# Altium PCB etapa_1.PcbDoc (part 1 of 2)
Units mm, origin at the board's own origin, x right, y up, seen from the top; angles counter-clockwise.
Board outline 39 x 30.7 mm, 4 copper layers (Top Layer, X, Y, Bottom Layer); 218 components, 89 nets, 624 pads, 178 vias.
Unrouted connection lines stored in the file: 2.
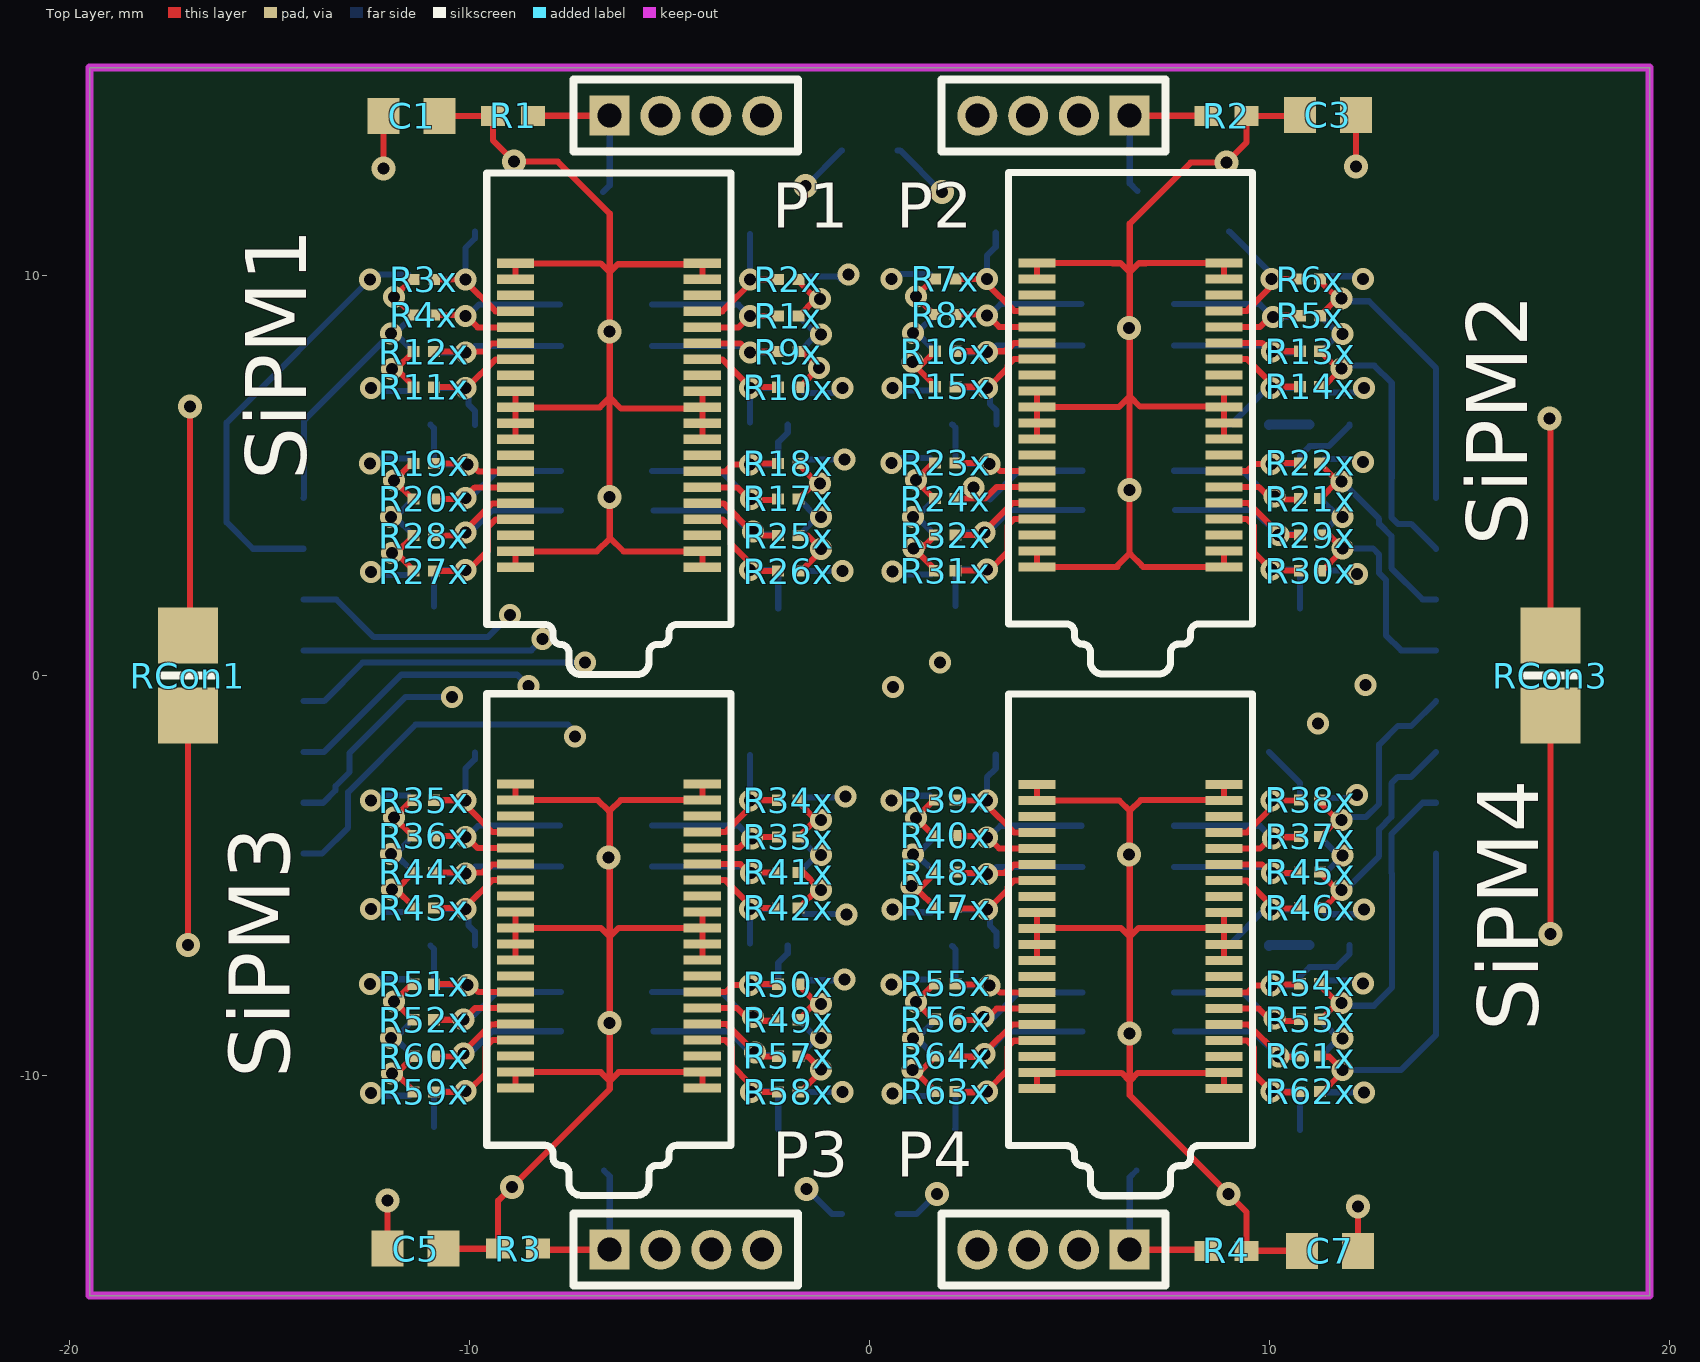
[diagram p0: Top Layer view]
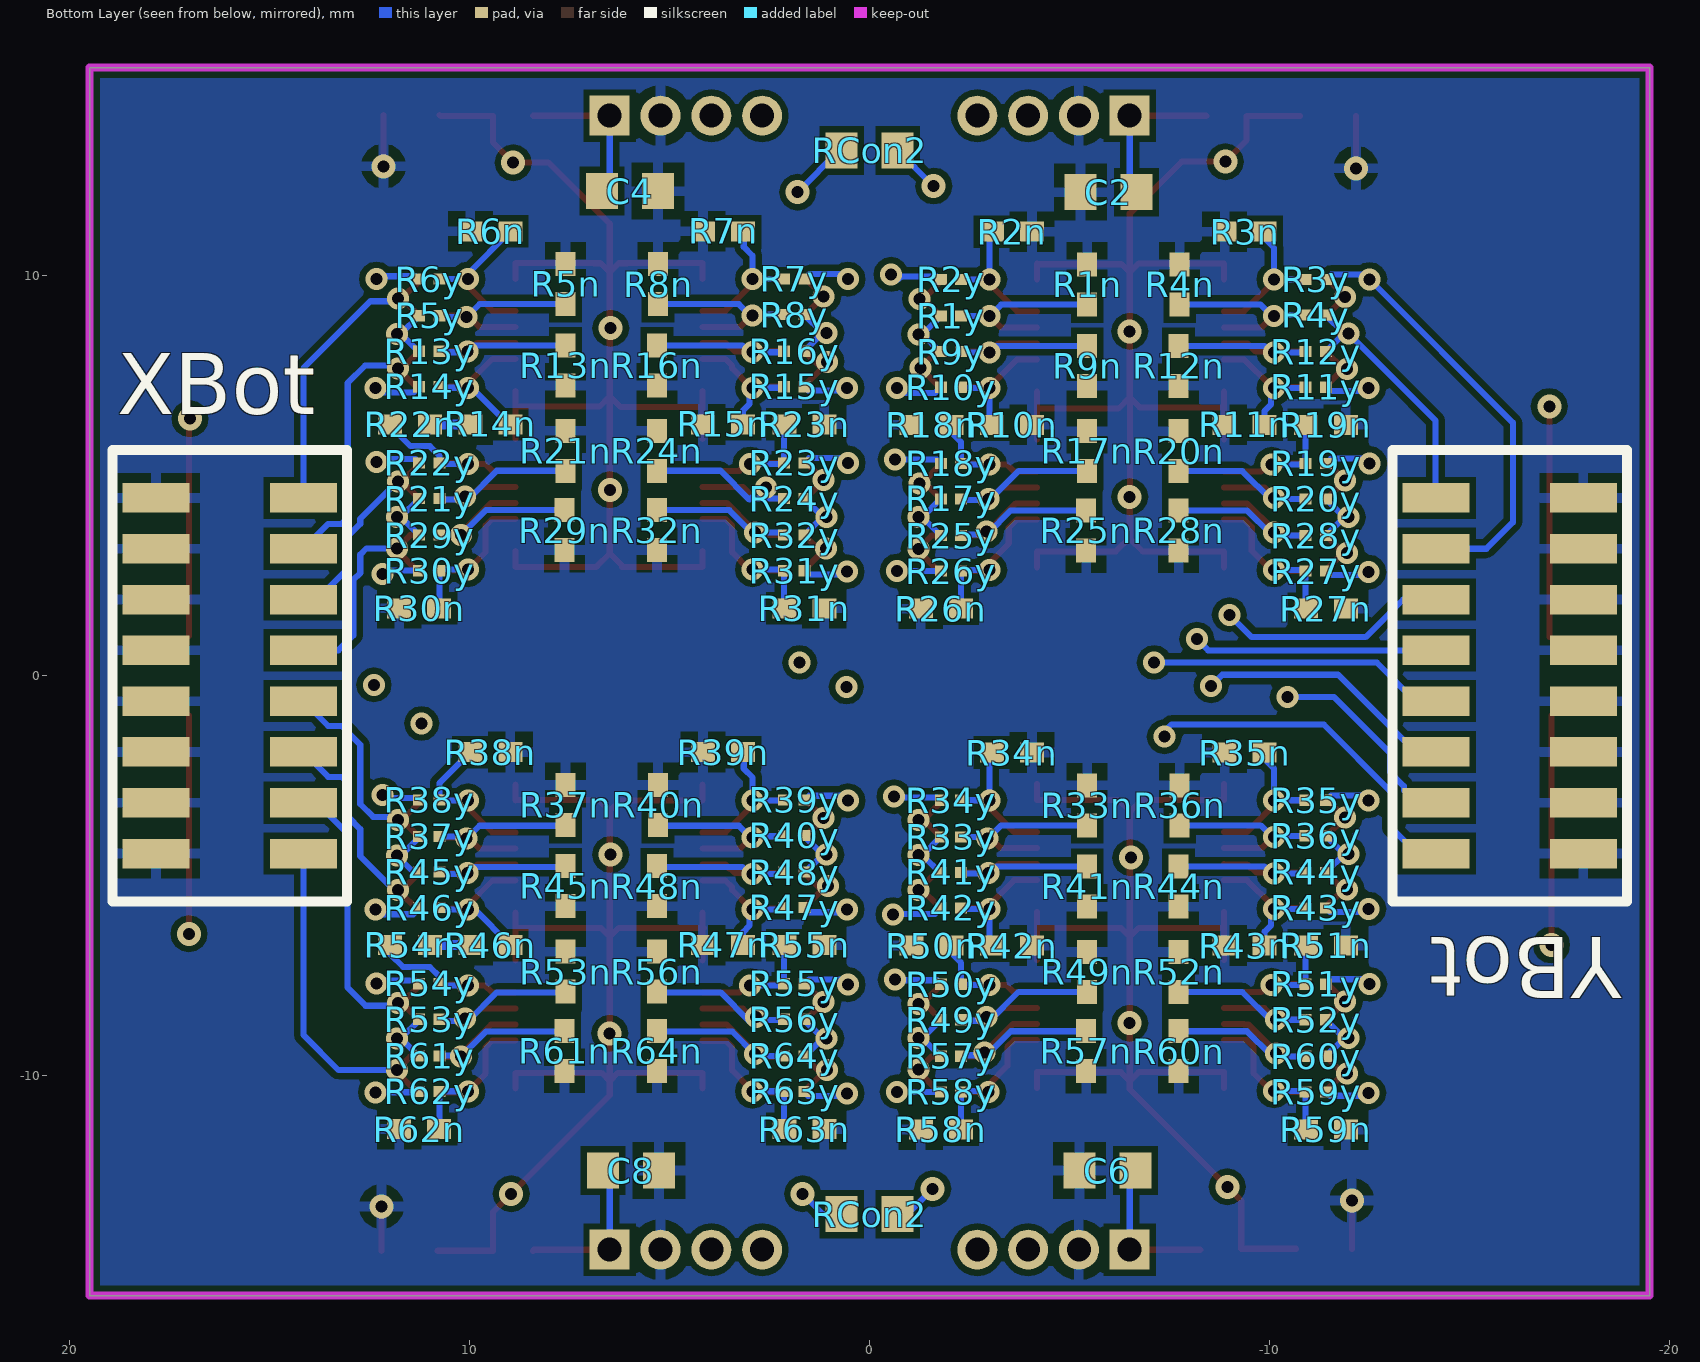
[diagram p1: Bottom Layer view, seen from below]
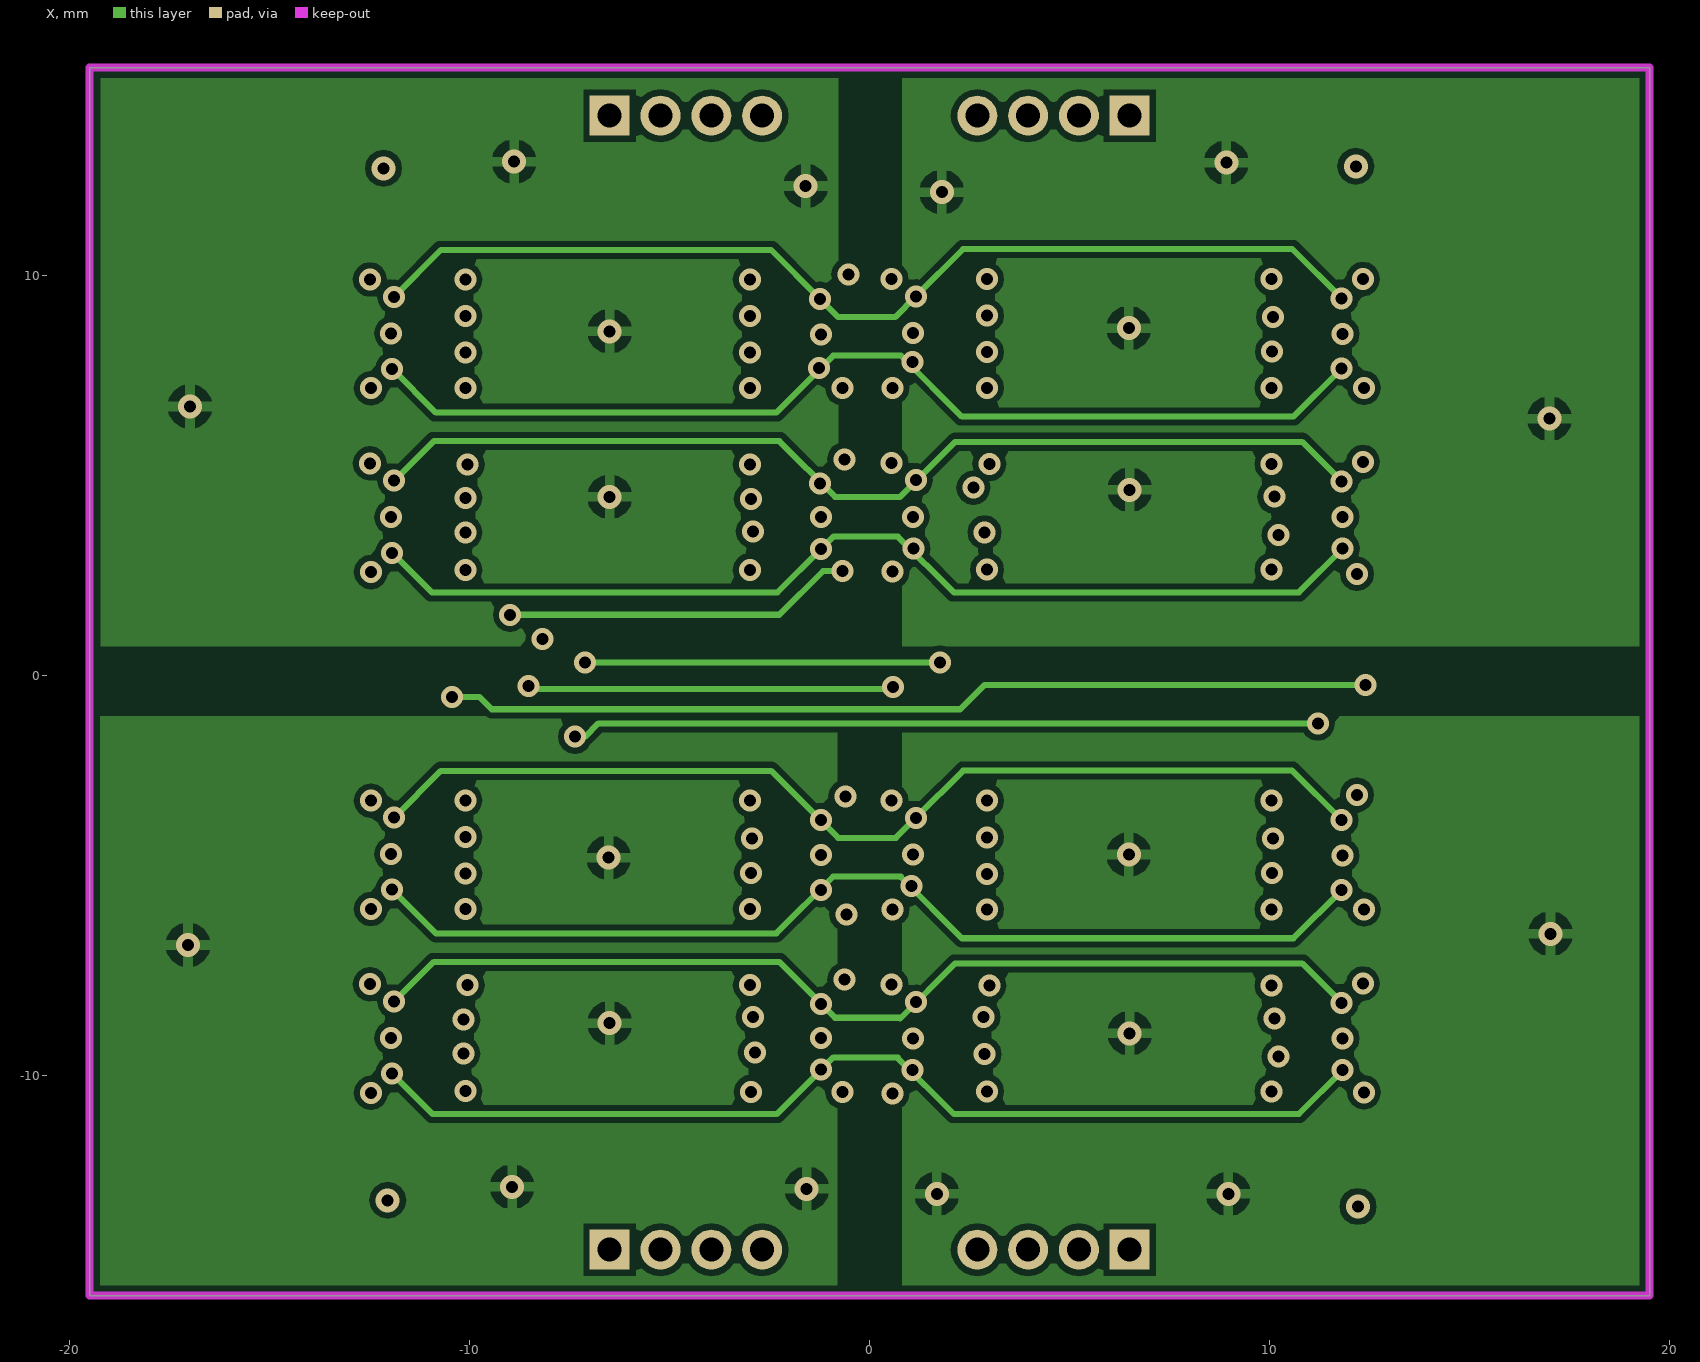
[diagram p2: X]
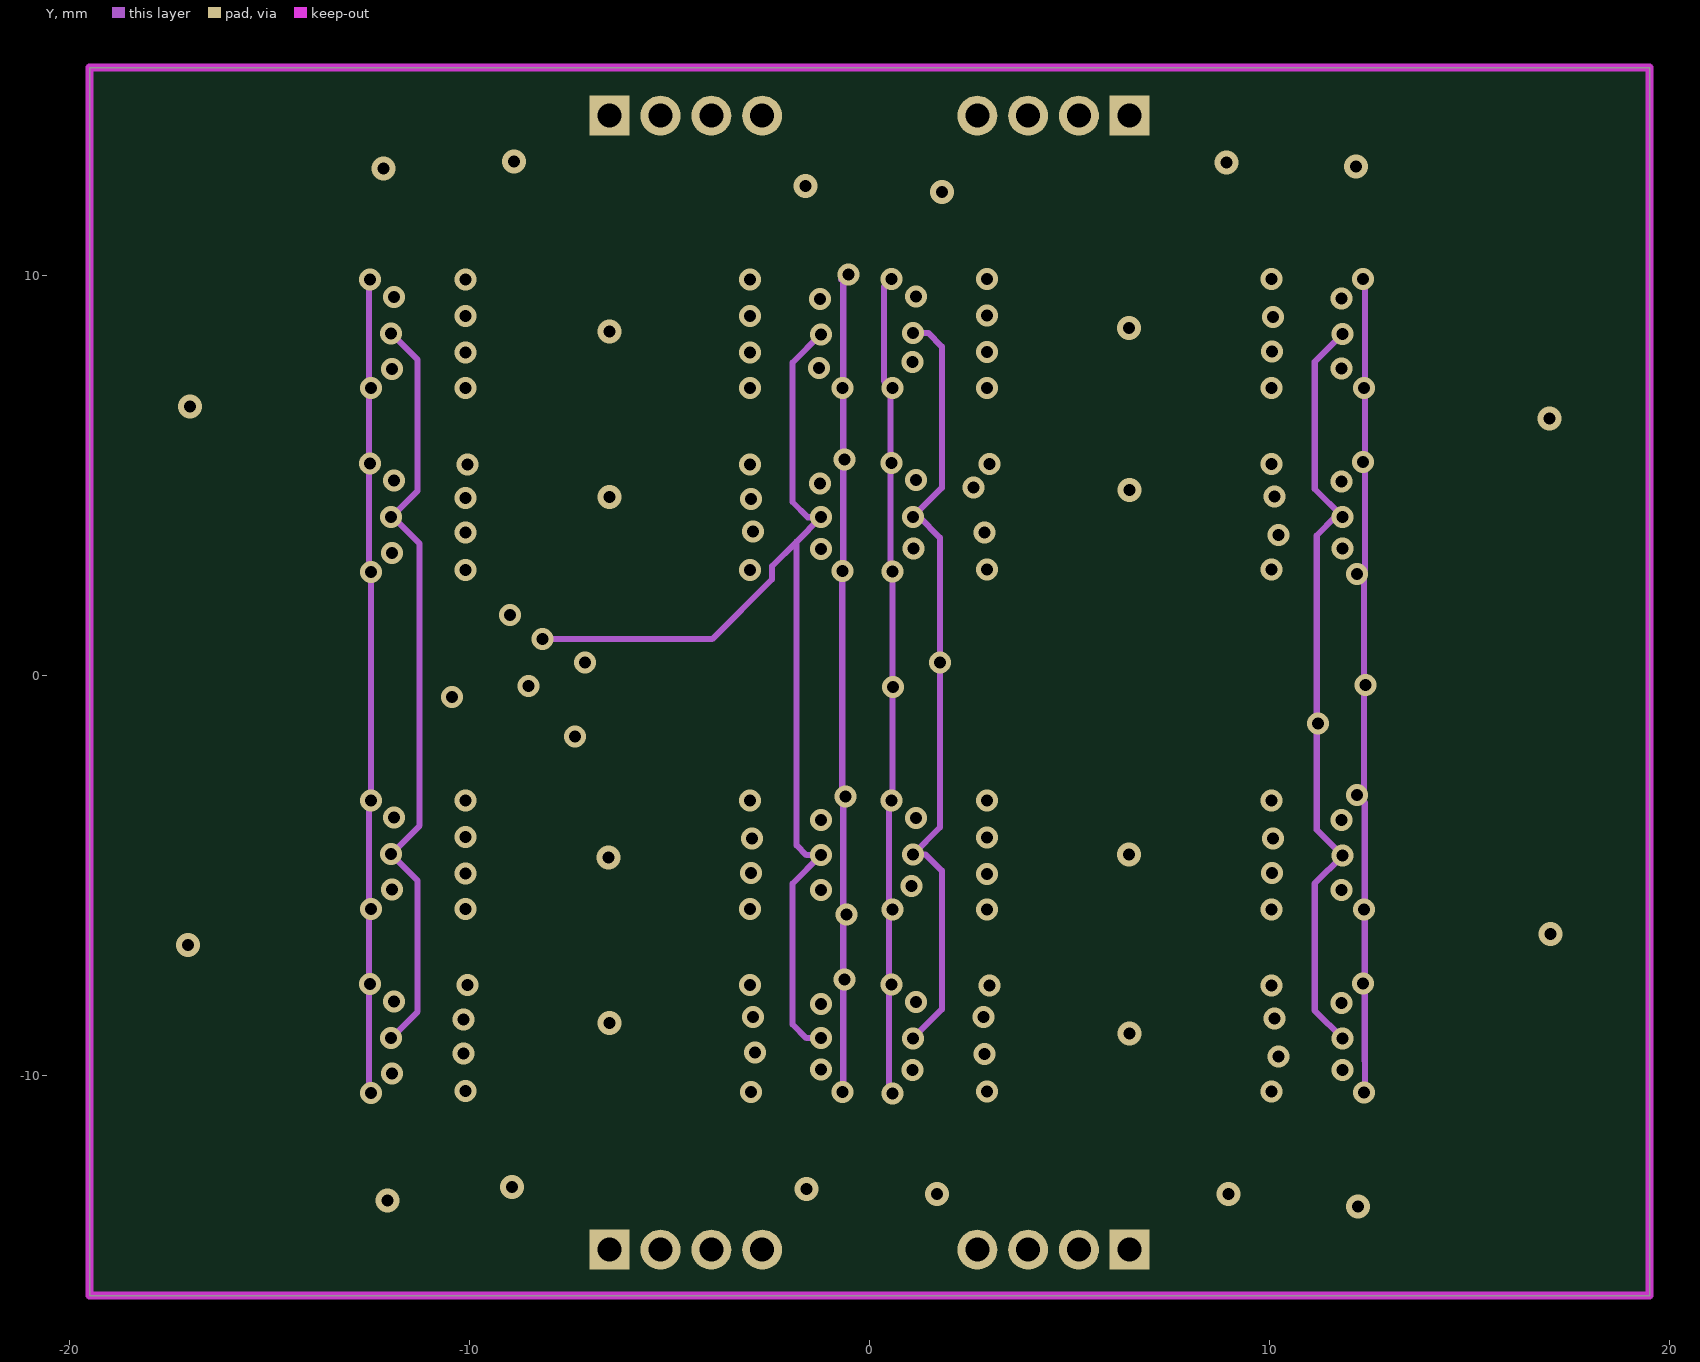
[diagram p3: Y]
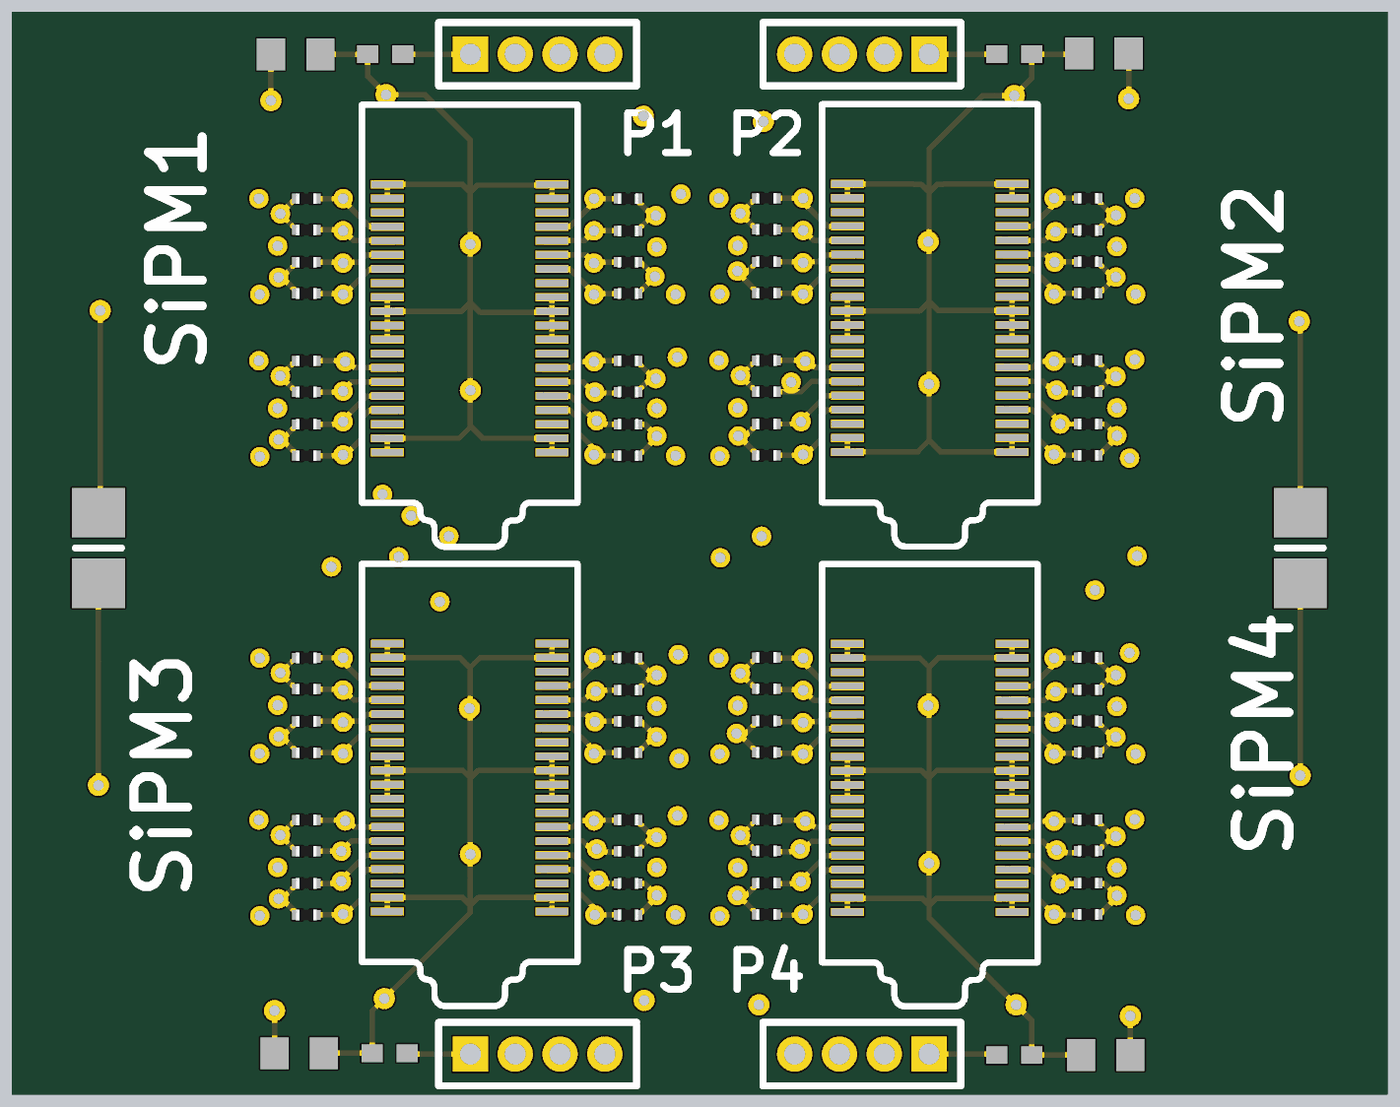
[diagram p5: 3D render of the assembled board from above, using the file's embedded part models]

## Layer stack, top to bottom
Top Solder: solder mask 0.0102, Solder Resist, Dk 3.5
Top Layer: signal copper 0.0356
Dielectric1: prepreg 0.32, FR-4, Dk 4.8
X: signal copper 0.0356
Dielectric3: core 0.32, FR-4, Dk 4.8
Y: signal copper 0.0356
Dielectric2: prepreg 0.32, FR-4, Dk 4.8
Bottom Layer: signal copper 0.0356
Bottom Solder: solder mask 0.0102, Solder Resist, Dk 3.5

## Board outline
-19.5,-15.5 -19.5,15.2 19.5,15.2 19.5,-15.5

## Design rules (kind name [scope] priority, off if disabled: settings)
Clearance Clearance_2 [InComponent('SiPM1')] p1: gap=0.15
Clearance Clearance_1 [IsTrack vs IsVia OR IsPad] p2: gap=0.203
Clearance [All] p3: gap=0.152
MinimumSolderMaskSliver MinimumSolderMaskSliver_1 [InComponent('SiPM1')] p1: minsoldermaskwidth=0.05
MinimumSolderMaskSliver [All] p2: minsoldermaskwidth=0.05
PasteMaskExpansion [InComponent('SiPM1')] p1: expansion=0
PlaneConnect PlaneConnect_1 [IsVia AND InNet('GND')] p1: planeconnectstyle=Direct reliefexpansion=0.508 reliefentries=4 reliefconductorwidth=0.254 reliefairgap=0.254
PlaneConnect [All] p2: planeconnectstyle=Relief reliefexpansion=0.508 reliefentries=4 reliefconductorwidth=0.254 reliefairgap=0.254
PolygonConnect [All] p1: connectstyle=Relief reliefconductorwidth=0.254 reliefentries=4 polygonreliefangle="90 Angle" airgapwidth=0.254
RoutingTopology [All] p1: topology=Daisy_Balanced
RoutingVias [All] p1: holewidth=0.3 width=0.6 viastyle="Through Hole" minholewidth=0.203 minwidth=0.406 maxholewidth=0.3 maxwidth=0.6
SilkToSilkClearance [All] p1: silktosilkclearance=0.127
SilkToSolderMaskClearance SilkscreenOverComponentPads [IsPad] p1: minsilkscreentomaskgap=0.127 clearancetoexposedcopper=TRUE
SolderMaskExpansion SolderMaskExpansion_2 [(InComponent('SiPM1') OR InComponent('SiPM2') OR InComponent('SiPM3') OR InComponent('SiPM4'))] p1: expansion=0.05
SolderMaskExpansion SolderMaskExpansion_1 [IsVia] p2: expansion=0.051
SolderMaskExpansion [All] p3: expansion=0.051
Width Width_1 [(InNet('GND') AND OnLayer('Bottom Layer'))] p1: maxlimit=0.381 minlimit=0.254 preferedwidth=0.305
Width [All] p2: maxlimit=0.152 minlimit=0.152 preferedwidth=0.152 minimp=50.000000 maximp=50.000000 favimp=50.000000
24 further rules are at their usual default settings.

## Classes and differential pairs
component class etapa_1: R1x R1y R2x R2y R3x R3y R4x R4y R5x R5y R6x R6y R7x R7y R8x R8y R9x R9y R10x R10y R11x R11y R12x R12y R13x R13y R14x R14y R15x R15y R16x R16y R17x R17y R18x R18y R19x R19y R20x R20y R21x R21y R22x R22y R23x R23y R24x R24y R25x R25y R26x R26y R27x R27y R28x R28y R29x R29y R30x R30y R31x R31y R32x R32y R33x R33y R34x R34y R35x R35y R36x R36y R37x R37y R38x R38y R39x R39y R40x R40y R41x R41y R42x R42y R43x R43y R44x R44y R45x R45y R46x R46y R47x R47y R48x R48y R49x R49y R50x R50y R51x R51y R52x R52y R53x R53y R54x R54y R55x R55y R56x R56y R57x R57y R58x R58y R59x R59y R60x R60y R61x R61y R62x R62y R63x R63y R64x R64y SiPM1 SiPM2
component class etapa_1_2: C1 C2 C3 C4 C5 C6 C7 C8 P1 P2 P3 P4 R1 R1n R2 R2n R3 R3n R4 R4n R5n R6n R7n R8n R9n R10n R11n R12n R13n R14n R15n R16n R17n R18n R19n R20n R21n R22n R23n R24n R25n R26n R27n R28n R29n R30n R31n R32n R33n R34n R35n R36n R37n R38n R39n R40n R41n R42n R43n R44n R45n R46n R47n R48n R49n R50n R51n R52n R53n R54n R55n R56n R57n R58n R59n R60n R61n R62n R63n R64n RCon1 RCon2 RCon3 SiPM3 SiPM4 XBot YBot

## Components (designator, comment, footprint, x,y, rotation, side; value= is the part's Value field where it differs from the comment)
C1 "Cap Semi" 1608[0603] -11.455,13.995 r0 top
C2 "Cap Semi" 1608[0603] -5.969,12.09 r0 bottom
C3 "Cap Semi" 1608[0603] 11.455,14.021 r180 top
C4 "Cap Semi" 1608[0603] 5.994,12.116 r180 bottom
C5 "Cap Semi" 1608[0603] -11.354,-14.326 r0 top
C6 "Cap Semi" 1608[0603] -5.944,-12.37 r0 bottom
C7 "Cap Semi" 1608[0603] 11.506,-14.376 r180 top
C8 "Cap Semi" 1608[0603] 5.969,-12.37 r180 bottom
P1 "MHDR1X4" MHDR1X4 -6.5,14 r0 top
P2 "MHDR1X4" MHDR1X4 6.5,14 r180 top
P3 "MHDR1X4" MHDR1X4 -6.5,-14.35 r0 top
P4 "MHDR1X4" MHDR1X4 6.5,-14.35 r180 top
R1 "Res3" 0402 -8.915,13.995 r0 top
R1n "Res3" 0402 -5.436,9.779 r270 bottom
R1x "Res3" RES0201 -2.032,8.992 r180 top
R1y "Res3" RES0201 -2.032,8.992 r0 bottom
R2 "Res3" 0402 8.915,13.995 r180 top
R2n "Res3" 0402 -3.556,11.1 r0 bottom
R2x "Res3" RES0201 -2.032,9.906 r180 top
R2y "Res3" RES0201 -2.032,9.906 r180 bottom
R3 "Res3" 0402 -8.788,-14.326 r0 top
R3n "Res3" 0402 -9.373,11.1 r180 bottom
R3x "Res3" RES0201 -11.151,9.906 r0 top
R3y "Res3" RES0201 -11.151,9.906 r0 bottom
R4 "Res3" 0402 8.915,-14.376 r180 top
R4n "Res3" 0402 -7.747,9.779 r270 bottom
R4x "Res3" RES0201 -11.151,9.017 r0 top
R4y "Res3" RES0201 -11.151,9.017 r0 bottom
R5n "Res3" 0402 7.604,9.789 r270 bottom
R5x "Res3" RES0201 11.008,9.002 r180 top
R5y "Res3" RES0201 11.008,9.002 r180 bottom
R6n "Res3" 0402 9.484,11.11 r180 bottom
R6x "Res3" RES0201 11.008,9.916 r180 top
R6y "Res3" RES0201 11.008,9.916 r180 bottom
R7n "Res3" 0402 3.667,11.11 r180 bottom
R7x "Res3" RES0201 1.889,9.916 r0 top
R7y "Res3" RES0201 1.889,9.916 r0 bottom
R8n "Res3" 0402 5.293,9.789 r270 bottom
R8x "Res3" RES0201 1.889,9.027 r0 top
R8y "Res3" RES0201 1.889,9.027 r0 bottom
R9n "Res3" 0402 -5.436,7.747 r90 bottom
R9x "Res3" RES0201 -2.032,8.103 r180 top
R9y "Res3" RES0201 -2.032,8.103 r180 bottom
R10n "Res3" 0402 -3.556,6.274 r0 bottom
R10x "Res3" RES0201 -2.032,7.214 r180 top
R10y "Res3" RES0201 -2.032,7.214 r180 bottom
R11n "Res3" 0402 -9.373,6.274 r180 bottom
R11x "Res3" RES0201 -11.151,7.214 r0 top
R11y "Res3" RES0201 -11.151,7.214 r0 bottom
R12n "Res3" 0402 -7.722,7.747 r90 bottom
R12x "Res3" RES0201 -11.151,8.103 r0 top
R12y "Res3" RES0201 -11.151,8.103 r0 bottom
R13n "Res3" 0402 7.604,7.757 r90 bottom
R13x "Res3" RES0201 11.008,8.113 r180 top
R13y "Res3" RES0201 11.008,8.113 r180 bottom
R14n "Res3" 0402 9.484,6.284 r180 bottom
R14x "Res3" RES0201 11.008,7.224 r180 top
R14y "Res3" RES0201 11.008,7.224 r180 bottom
R15n "Res3" 0402 3.667,6.284 r180 bottom
R15x "Res3" RES0201 1.889,7.224 r0 top
R15y "Res3" RES0201 1.889,7.224 r0 bottom
R16n "Res3" 0402 5.318,7.757 r90 bottom
R16x "Res3" RES0201 1.889,8.113 r0 top
R16y "Res3" RES0201 1.889,8.113 r0 bottom
R17n "Res3" 0402 -5.436,5.613 r270 bottom
R17x "Res3" RES0201 -2.032,4.42 r180 top
R17y "Res3" RES0201 -2.032,4.42 r180 bottom
R18n "Res3" 0402 -1.549,6.274 r180 bottom
R18x "Res3" RES0201 -2.032,5.309 r180 top
R18y "Res3" RES0201 -2.032,5.309 r180 bottom
R19n "Res3" 0402 -11.405,6.274 r0 bottom
R19x "Res3" RES0201 -11.151,5.309 r0 top
R19y "Res3" RES0201 -11.151,5.309 r0 bottom
R20n "Res3" 0402 -7.722,5.613 r270 bottom
R20x "Res3" RES0201 -11.151,4.42 r0 top
R20y "Res3" RES0201 -11.151,4.42 r0 bottom
R21n "Res3" 0402 7.604,5.623 r270 bottom
R21x "Res3" RES0201 11.008,4.43 r180 top
R21y "Res3" RES0201 11.008,4.43 r180 bottom
R22n "Res3" 0402 11.491,6.284 r0 bottom
R22x "Res3" RES0201 11.008,5.319 r180 top
R22y "Res3" RES0201 11.008,5.319 r180 bottom
R23n "Res3" 0402 1.635,6.284 r0 bottom
R23x "Res3" RES0201 1.889,5.319 r0 top
R23y "Res3" RES0201 1.889,5.319 r0 bottom
R24n "Res3" 0402 5.318,5.623 r270 bottom
R24x "Res3" RES0201 1.889,4.43 r0 top
R24y "Res3" RES0201 1.889,4.43 r0 bottom
R25n "Res3" 0402 -5.41,3.632 r90 bottom
R25x "Res3" RES0201 -2.032,3.505 r180 top
R25y "Res3" RES0201 -2.032,3.505 r180 bottom
R26n "Res3" 0402 -1.778,1.676 r180 bottom
R26x "Res3" RES0201 -2.032,2.616 r180 top
R26y "Res3" RES0201 -2.032,2.616 r180 bottom
R27n "Res3" 0402 -11.405,1.676 r0 bottom
R27x "Res3" RES0201 -11.151,2.616 r0 top
R27y "Res3" RES0201 -11.151,2.616 r0 bottom
R28n "Res3" 0402 -7.722,3.632 r90 bottom
R28x "Res3" RES0201 -11.151,3.505 r0 top
R28y "Res3" RES0201 -11.151,3.505 r0 bottom
R29n "Res3" 0402 7.63,3.642 r90 bottom
R29x "Res3" RES0201 11.008,3.515 r180 top
R29y "Res3" RES0201 11.008,3.515 r180 bottom
R30n "Res3" 0402 11.262,1.686 r180 bottom
R30x "Res3" RES0201 11.008,2.626 r180 top
R30y "Res3" RES0201 11.008,2.626 r180 bottom
R31n "Res3" 0402 1.635,1.686 r0 bottom
R31x "Res3" RES0201 1.889,2.626 r0 top
R31y "Res3" RES0201 1.889,2.626 r0 bottom
R32n "Res3" 0402 5.318,3.642 r90 bottom
R32x "Res3" RES0201 1.889,3.515 r0 top
R32y "Res3" RES0201 1.889,3.515 r0 bottom
R33n "Res3" 0402 -5.436,-3.241 r270 bottom
R33x "Res3" RES0201 -2.032,-4.028 r180 top
R33y "Res3" RES0201 -2.032,-4.028 r180 bottom
R34n "Res3" 0402 -3.556,-1.92 r0 bottom
R34x "Res3" RES0201 -2.032,-3.114 r180 top
R34y "Res3" RES0201 -2.032,-3.114 r180 bottom
R35n "Res3" 0402 -9.373,-1.92 r180 bottom
R35x "Res3" RES0201 -11.151,-3.114 r0 top
R35y "Res3" RES0201 -11.151,-3.114 r0 bottom
R36n "Res3" 0402 -7.747,-3.241 r270 bottom
R36x "Res3" RES0201 -11.151,-4.003 r0 top
R36y "Res3" RES0201 -11.151,-4.003 r0 bottom
R37n "Res3" 0402 7.604,-3.231 r270 bottom
R37x "Res3" RES0201 11.008,-4.018 r180 top
R37y "Res3" RES0201 11.008,-4.018 r180 bottom
R38n "Res3" 0402 9.484,-1.91 r0 bottom
R38x "Res3" RES0201 11.008,-3.104 r180 top
R38y "Res3" RES0201 11.008,-3.104 r180 bottom
R39n "Res3" 0402 3.667,-1.91 r180 bottom
R39x "Res3" RES0201 1.889,-3.104 r0 top
R39y "Res3" RES0201 1.889,-3.104 r0 bottom
R40n "Res3" 0402 5.293,-3.231 r270 bottom
R40x "Res3" RES0201 1.889,-3.993 r0 top
R40y "Res3" RES0201 1.889,-3.993 r0 bottom
R41n "Res3" 0402 -5.436,-5.273 r90 bottom
R41x "Res3" RES0201 -2.032,-4.917 r180 top
R41y "Res3" RES0201 -2.032,-4.917 r180 bottom
R42n "Res3" 0402 -3.556,-6.746 r0 bottom
R42x "Res3" RES0201 -2.032,-5.806 r180 top
R42y "Res3" RES0201 -2.032,-5.806 r180 bottom
R43n "Res3" 0402 -9.373,-6.746 r180 bottom
R43x "Res3" RES0201 -11.151,-5.806 r0 top
R43y "Res3" RES0201 -11.151,-5.806 r0 bottom
R44n "Res3" 0402 -7.722,-5.273 r90 bottom
R44x "Res3" RES0201 -11.151,-4.917 r0 top
R44y "Res3" RES0201 -11.151,-4.917 r0 bottom
R45n "Res3" 0402 7.604,-5.263 r90 bottom
R45x "Res3" RES0201 11.008,-4.907 r180 top
R45y "Res3" RES0201 11.008,-4.907 r180 bottom
R46n "Res3" 0402 9.484,-6.736 r180 bottom
R46x "Res3" RES0201 11.008,-5.796 r180 top
R46y "Res3" RES0201 11.008,-5.796 r180 bottom
R47n "Res3" 0402 3.667,-6.736 r180 bottom
R47x "Res3" RES0201 1.889,-5.796 r0 top
R47y "Res3" RES0201 1.889,-5.796 r0 bottom
R48n "Res3" 0402 5.318,-5.263 r90 bottom
R48x "Res3" RES0201 1.889,-4.907 r0 top
R48y "Res3" RES0201 1.889,-4.907 r0 bottom
R49n "Res3" 0402 -5.436,-7.407 r270 bottom
R49x "Res3" RES0201 -2.032,-8.6 r180 top
R49y "Res3" RES0201 -2.032,-8.6 r180 bottom
R50n "Res3" 0402 -1.549,-6.746 r180 bottom
R50x "Res3" RES0201 -2.032,-7.711 r180 top
R50y "Res3" RES0201 -2.032,-7.711 r180 bottom
R51n "Res3" 0402 -11.405,-6.746 r0 bottom
R51x "Res3" RES0201 -11.151,-7.711 r0 top
R51y "Res3" RES0201 -11.151,-7.711 r0 bottom
R52n "Res3" 0402 -7.722,-7.407 r270 bottom
R52x "Res3" RES0201 -11.151,-8.6 r0 top
R52y "Res3" RES0201 -11.151,-8.6 r0 bottom
R53n "Res3" 0402 7.604,-7.397 r270 bottom
R53x "Res3" RES0201 11.008,-8.59 r180 top
R53y "Res3" RES0201 11.008,-8.59 r180 bottom
R54n "Res3" 0402 11.491,-6.736 r0 bottom
R54x "Res3" RES0201 11.008,-7.701 r180 top
R54y "Res3" RES0201 11.008,-7.701 r180 bottom
R55n "Res3" 0402 1.635,-6.736 r0 bottom
R55x "Res3" RES0201 1.889,-7.701 r0 top
R55y "Res3" RES0201 1.889,-7.701 r0 bottom
R56n "Res3" 0402 5.318,-7.397 r270 bottom
R56x "Res3" RES0201 1.889,-8.59 r0 top
R56y "Res3" RES0201 1.889,-8.59 r0 bottom
R57n "Res3" 0402 -5.41,-9.388 r90 bottom
R57x "Res3" RES0201 -2.032,-9.515 r180 top
R57y "Res3" RES0201 -2.032,-9.515 r180 bottom
R58n "Res3" 0402 -1.778,-11.344 r180 bottom
R58x "Res3" RES0201 -2.032,-10.404 r180 top
R58y "Res3" RES0201 -2.032,-10.404 r180 bottom
R59n "Res3" 0402 -11.405,-11.344 r0 bottom
R59x "Res3" RES0201 -11.151,-10.404 r0 top
R59y "Res3" RES0201 -11.151,-10.404 r0 bottom
R60n "Res3" 0402 -7.722,-9.388 r90 bottom
R60x "Res3" RES0201 -11.151,-9.515 r0 top
R60y "Res3" RES0201 -11.151,-9.515 r0 bottom
R61n "Res3" 0402 7.63,-9.378 r90 bottom
R61x "Res3" RES0201 11.008,-9.505 r180 top
R61y "Res3" RES0201 11.008,-9.505 r180 bottom
R62n "Res3" 0402 11.262,-11.334 r180 bottom
R62x "Res3" RES0201 11.008,-10.394 r180 top
R62y "Res3" RES0201 11.008,-10.394 r180 bottom
R63n "Res3" 0402 1.635,-11.334 r0 bottom
R63x "Res3" RES0201 1.889,-10.394 r0 top
R63y "Res3" RES0201 1.889,-10.394 r0 bottom
R64n "Res3" 0402 5.318,-9.378 r90 bottom
R64x "Res3" RES0201 1.889,-9.505 r0 top
R64y "Res3" RES0201 1.889,-9.505 r0 bottom
RCon1 "Res3" 6-0805_M -17.043,0 r270 top
RCon2 "Res3" 1608[0603] 0,-13.462 r0 bottom
RCon2 "Res3" 1608[0603] 0,13.132 r180 bottom
RCon3 "Res3" 6-0805_M 17.018,0 r90 top
SiPM1 "SS4-20-X-X-D" SS4-20-X-X-D -6.52,6.51 r270 top
SiPM2 "SS4-20-X-X-D" SS4-20-X-X-D 6.52,6.52 r270 top
SiPM3 "SS4-20-X-X-D" SS4-20-X-X-D -6.52,-6.51 r270 top
SiPM4 "SS4-20-X-X-D" SS4-20-X-X-D 6.52,-6.52 r270 top
XBot "FLE-108-01-XX-DV" FLE-108-01-XX-DV 16,0 r90 bottom
YBot "FLE-108-01-XX-DV" FLE-108-01-XX-DV -16,0 r270 bottom

## Footprints (in the part's own frame and the unit in brackets; to place one, negate y for a bottom-side part, rotate by r counter-clockwise, add the part's x,y. Pads: shape width x height; smd on the part's side, far side on the other; paste and mask are expansions set on the pad)
6-0805_M [mm] "Chip Resistor, Body 2.0x1.2mm, IPC Low Density"
  rect 1.4x1.5 smd: 1(-1,0) 2(1,0)
  silkscreen extent 0,-0.65 0,0.65, body extent -1.07,-0.7 1.07,0.7, height 0.7
0402 [mm] "Chip Capacitor, Body 1.0x0.5mm, IPC High Density"
  rect 0.6x0.5 smd: 1(-0.5,0) 2(0.5,0)
  body extent -0.55,-0.3 0.55,0.3, height 1.3
1608[0603] [mm] "Chip Capacitor, Body 1.6x0.8mm, IPC High Density"
  rect 0.8x0.9 smd: 1(-0.7,0) 2(0.7,0)
  body extent -0.87,-0.48 0.87,0.48, height 1.3
FLE-108-01-XX-DV [mil]
  rect 29x66 smd mask+2: 1(-175,72.5) 2(-175,-72.5) 3(-125,72.5) 4(-125,-72.5) 5(-75,72.5) 6(-75,-72.5) 7(-25,72.5) 8(-25,-72.5) 9(25,72.5) 10(25,-72.5) 11(75,72.5) 12(75,-72.5) 13(125,72.5) 14(125,-72.5) 15(175,72.5) 16(175,-72.5)
  silkscreen extent -222,-116 222,116
MHDR1X4 [mm] "Connector; Header; 4 Position"
  rect 1x1 hole 0.6: 1(0,0)
  round 1 hole 0.6: 2(1.27,0) 3(2.54,0) 4(3.81,0)
  silkscreen extent -0.9,-0.9 4.71,0.9
RES0201 [mm] "Chip Resistor, 2-Leads, Body 0.6x0.3mm, IPC Medium Density"
  rect 0.3x0.28 smd: 1(-0.255,0) 2(0.255,0)
  body extent -0.32,-0.17 0.32,0.16, height 0.3
SS4-20-X-X-D [mm]
  rect 0.23x0.93 smd paste-0.02 mask+0.05: 1(3.8,-2.335) 2(3.4,-2.335) 3(3,-2.335) 4(2.6,-2.335) 5(2.2,-2.335) 6(1.8,-2.335) 7(1.4,-2.335) 8(1,-2.335) 9(0.6,-2.335) 10(0.2,-2.335) 11(-0.2,-2.335) 12(-0.6,-2.335) 13(-1,-2.335) 14(-1.4,-2.335) 15(-1.8,-2.335) 16(-2.2,-2.335) 17(-2.6,-2.335) 18(-3,-2.335) 19(-3.4,-2.335) 20(-3.8,-2.335) 21(-3.8,2.335) 22(-3.4,2.335) 23(-3,2.335) 24(-2.6,2.335) 25(-2.2,2.335) 26(-1.8,2.335) 27(-1.4,2.335) 28(-1,2.335) 29(-0.6,2.335) 30(-0.2,2.335) 31(0.2,2.335) 32(0.6,2.335) 33(1,2.335) 34(1.4,2.335) 35(1.8,2.335) 36(2.2,2.335) 37(2.6,2.335) 38(3,2.335) 39(3.4,2.335) 40(3.8,2.335)
  silkscreen extent -6.06,-3.05 6.48,3.05

## Part data
C1 C2 C3 C4 C5 C6 C7 C8: "Capacitor (Semiconductor SIM Model)"
P1 P2 P3 P4: "Header, 4-Pin"
R1 R1n R1x R1y R2 R2n R2x R2y R3 R3n R3x R3y R4 R4n R4x R4y R5n R5x R5y R6n R6x R6y R7n R7x R7y R8n R8x R8y R9n R9x R9y R10n R10x R10y R11n R11x R11y R12n R12x R12y R13n R13x R13y R14n R14x R14y R15n R15x R15y R16n R16x R16y R17n R17x R17y R18n R18x R18y R19n R19x R19y R20n R20x R20y R21n R21x R21y R22n R22x R22y R23n R23x R23y R24n R24x R24y R25n R25x R25y R26n R26x R26y R27n R27x R27y R28n R28x R28y R29n R29x R29y R30n R30x R30y R31n R31x R31y R32n R32x R32y R33n R33x R33y R34n R34x R34y R35n R35x R35y R36n R36x R36y R37n R37x R37y R38n R38x R38y R39n R39x R39y R40n R40x R40y R41n R41x R41y R42n R42x R42y R43n R43x R43y R44n R44x R44y R45n R45x R45y R46n R46x R46y R47n R47x R47y R48n R48x R48y R49n R49x R49y R50n R50x R50y R51n R51x R51y R52n R52x R52y R53n R53x R53y R54n R54x R54y R55n R55x R55y R56n R56x R56y R57n R57x R57y R58n R58x R58y R59n R59x R59y R60n R60x R60y R61n R61x R61y R62n R62x R62y R63n R63x R63y R64n R64x R64y RCon1 RCon2 RCon2 RCon3: "Resistor"
XBot YBot: "DUAL ROW 0.050'' STRIP ASSEMBLY."

## Via types
v1: diameter 0.55, hole 0.3, Top Layer to Bottom Layer, 154 vias
v2: diameter 0.6, hole 0.3, Top Layer to Bottom Layer, 24 vias

## Nets (pads, with @x,y where several pads share a name; then routed paths per layer and width w, separated by ;. In a path a pad name is that pad's centre, name@x,y a point inside that pad or via, vN(x,y) a via of type N, cw(c..) or ccw(c..) an arc to the next point about the centre after c; other vN are vias at no path point)
+HV_1: C1.2 R1.1 RCon1.1 RCon2.2@-0.7,13.132 SiPM1.1 SiPM1.2 SiPM1.9 SiPM1.10 SiPM1.11 SiPM1.12 SiPM1.19 SiPM1.20 SiPM1.21 SiPM1.22 SiPM1.29 SiPM1.30 SiPM1.31 SiPM1.32 SiPM1.39 SiPM1.40 | length 39.5
  Top Layer w0.152: RCon1.1@-16.993,0.965 v2(-16.993,6.731) ; C1.2@-10.755,13.995 R1.1@-9.415,13.995 -9.415,13.378 v2(-8.89,12.852) -7.798,12.852 -6.5,11.555 -6.5,10.084 ; SiPM1.1@-8.855,2.71 SiPM1.2@-8.855,3.11 -6.819,3.11 -6.5,3.429 -6.5,3.454 ; SiPM1.9@-8.855,5.91 SiPM1.10@-8.855,6.31 SiPM1.11@-8.855,6.71 ; SiPM1.12@-8.855,7.11 SiPM1.11@-8.855,6.71 ; SiPM1.19@-8.855,9.91 SiPM1.20@-8.855,10.31 -6.726,10.31 -6.5,10.084 ; v2(-6.5,4.47) -6.502,6.957 ; v2(-6.5,4.47) -6.5,3.454 ; SiPM1.40@-4.185,2.71 SiPM1.39@-4.185,3.11 -6.156,3.11 -6.5,3.454 ; SiPM1.32@-4.185,5.91 SiPM1.31@-4.185,6.31 SiPM1.30@-4.185,6.71 ; SiPM1.29@-4.185,7.11 SiPM1.30@-4.185,6.71 ; SiPM1.22@-4.185,9.91 SiPM1.21@-4.185,10.31 -4.208,10.287 -6.297,10.287 -6.5,10.084 ; SiPM1.11@-8.855,6.71 -6.75,6.71 -6.502,6.957 ; -6.502,6.957 -6.5,6.96 ; -6.5,6.96 v2(-6.5,8.611) -6.5,10.084 ; -6.5,6.96 -6.221,6.68 -4.215,6.68 SiPM1.30@-4.185,6.71
  Bottom Layer w0.152: v2(-1.6,12.243) -1.589,12.243 RCon2.2@-0.7,13.132
+HV_2: C3.2 R2.1 RCon2.1@0.7,13.132 RCon3.2 SiPM2.1 SiPM2.2 SiPM2.9 SiPM2.10 SiPM2.11 SiPM2.12 SiPM2.19 SiPM2.20 SiPM2.21 SiPM2.22 SiPM2.29 SiPM2.30 SiPM2.31 SiPM2.32 SiPM2.39 SiPM2.40 | length 39.6
  Top Layer w0.152: SiPM2.2@4.185,3.12 SiPM2.1@4.185,2.72 6.189,2.72 ; SiPM2.9@4.185,5.92 SiPM2.10@4.185,6.32 SiPM2.11@4.185,6.72 ; SiPM2.12@4.185,7.12 SiPM2.11@4.185,6.72 ; SiPM2.19@4.185,9.92 SiPM2.20@4.185,10.32 6.063,10.32 6.071,10.312 6.271,10.312 6.5,10.084 ; 6.189,2.747 6.499,3.057 v2(6.499,4.648) 6.499,6.983 ; 6.525,3.031 6.796,2.76 ; 6.836,2.72 SiPM2.40@8.855,2.72 SiPM2.39@8.855,3.12 ; SiPM2.30@8.844,6.731 6.753,6.731 6.5,6.984 ; SiPM2.32@8.855,5.92 SiPM2.31@8.855,6.32 SiPM2.30@8.855,6.72 SiPM2.29@8.855,7.12 ; SiPM2.22@8.855,9.92 SiPM2.21@8.855,10.32 6.916,10.32 6.909,10.312 6.729,10.312 6.5,10.084 ; C3.2@10.755,14.021 10.73,13.995 R2.1@9.415,13.995 9.415,13.327 v2(8.915,12.827) 8.026,12.827 6.5,11.301 6.5,10.084 ; v2(16.993,6.426) 17.018,6.401 RCon3.2@17.018,1 ; SiPM2.11@4.185,6.72 6.234,6.72 6.499,6.983 ; 6.499,6.983 6.5,6.984 ; 6.5,6.984 6.5,10.084
  Bottom Layer w0.152: RCon2.1@0.7,13.132 0.762,13.132 v2(1.803,12.09)
  other v2: 6.477,8.687
+HV_3: C5.2 R3.1 RCon1.2 RCon2.1@-0.7,-13.462 SiPM3.1 SiPM3.2 SiPM3.9 SiPM3.10 SiPM3.11 SiPM3.12 SiPM3.19 SiPM3.20 SiPM3.21 SiPM3.22 SiPM3.29 SiPM3.30 SiPM3.31 SiPM3.32 SiPM3.39 SiPM3.40 | length 38.9
  Top Layer w0.152: v2(-17.043,-6.731) RCon1.2@-17.043,-1 ; C5.2@-10.654,-14.326 R3.1@-9.288,-14.326 -9.288,-13.124 v2(-8.941,-12.776) -6.5,-10.335 -6.5,-10.133 ; SiPM3.1@-8.855,-10.31 SiPM3.2@-8.855,-9.91 -6.723,-9.91 -6.5,-10.133 ; SiPM3.9@-8.855,-7.11 SiPM3.10@-8.855,-6.71 SiPM3.11@-8.855,-6.31 ; SiPM3.12@-8.855,-5.91 SiPM3.11@-8.855,-6.31 ; SiPM3.20@-8.855,-2.71 SiPM3.19@-8.855,-3.11 -6.796,-3.11 -6.525,-3.381 -6.5,-3.381 ; SiPM3.40@-4.185,-10.31 SiPM3.39@-4.185,-9.91 -6.277,-9.91 -6.5,-10.133 ; SiPM3.32@-4.185,-7.11 SiPM3.31@-4.185,-6.71 SiPM3.30@-4.185,-6.31 ; SiPM3.29@-4.185,-5.91 SiPM3.30@-4.185,-6.31 ; SiPM3.21@-4.185,-2.71 SiPM3.22@-4.185,-3.11 -6.229,-3.11 -6.5,-3.381 ; SiPM3.11@-8.855,-6.31 -6.715,-6.31 -6.5,-6.525 ; -6.5,-10.133 v2(-6.5,-8.687) -6.5,-6.525 ; -6.5,-6.525 -6.5,-3.381 ; -6.5,-6.525 -6.285,-6.31 SiPM3.30@-4.185,-6.31
  Bottom Layer w0.152: v2(-1.575,-12.827) -0.94,-13.462 RCon2.1@-0.7,-13.462
  other v2: -6.528,-4.547
+HV_4: C7.2 R4.1 RCon2.2@0.7,-13.462 RCon3.1 SiPM4.1 SiPM4.2 SiPM4.9 SiPM4.10 SiPM4.11 SiPM4.12 SiPM4.19 SiPM4.20 SiPM4.21 SiPM4.22 SiPM4.29 SiPM4.30 SiPM4.31 SiPM4.32 SiPM4.39 SiPM4.40 | length 38.7
  Top Layer w0.152: SiPM4.11@4.145,-6.31 SiPM4.11@4.185,-6.31 ; SiPM4.1@4.185,-10.32 4.185,-9.931 6.298,-9.931 6.5,-10.133 ; SiPM4.9@4.185,-7.12 SiPM4.10@4.185,-6.72 SiPM4.11@4.185,-6.32 SiPM4.11@4.185,-6.31 ; SiPM4.12@4.185,-5.92 SiPM4.11@4.185,-6.31 ; SiPM4.20@4.185,-2.72 SiPM4.19@4.185,-3.12 6.239,-3.12 6.5,-3.381 ; SiPM4.30@8.815,-6.31 6.715,-6.31 6.5,-6.525 ; SiPM4.22@8.815,-3.11 6.771,-3.11 6.5,-3.381 ; SiPM4.40@8.855,-10.32 8.855,-9.931 6.702,-9.931 6.5,-10.133 ; SiPM4.32@8.855,-7.12 SiPM4.31@8.855,-6.72 SiPM4.30@8.855,-6.32 SiPM4.29@8.855,-5.92 ; SiPM4.22@8.855,-3.12 SiPM4.21@8.855,-2.72 ; C7.2@10.806,-14.376 R4.1@9.415,-14.376 9.415,-13.403 v2(8.966,-12.954) 6.5,-10.488 6.5,-10.133 ; v2(17.018,-6.452) RCon3.1@17.018,-1 ; SiPM4.11@4.185,-6.31 6.285,-6.31 6.5,-6.525 ; 6.5,-10.133 v2(6.5,-8.941) 6.5,-6.525 ; 6.5,-6.525 6.5,-3.381
  Bottom Layer w0.152: RCon2.2@0.7,-13.462 1.168,-13.462 v2(1.676,-12.954)
  other v2: 6.477,-4.47
GND: C1.1 C2.2 C3.1 C4.2 C5.1 C6.2 C7.1 C8.2 P1.2 P2.2 P3.2 P4.2 R1n.1 R2n.1 R3n.1 R4n.1 R5n.1 R6n.1 R7n.1 R8n.1 R9n.1 R10n.1 R11n.1 R12n.1 R13n.1 R14n.1 R15n.1 R16n.1 R17n.1 R18n.1 R19n.1 R20n.1 R21n.1 R22n.1 R23n.1 R24n.1 R25n.1 R26n.1 R27n.1 R28n.1 R29n.1 R30n.1 R31n.1 R32n.1 R33n.1 R34n.1 R35n.1 R36n.1 R37n.1 R38n.1 R39n.1 R40n.1 R41n.1 R42n.1 R43n.1 R44n.1 R45n.1 R46n.1 R47n.1 R48n.1 R49n.1 R50n.1 R51n.1 R52n.1 R53n.1 R54n.1 R55n.1 R56n.1 R57n.1 R58n.1 R59n.1 R60n.1 R61n.1 R62n.1 R63n.1 R64n.1 XBot.1 XBot.3 XBot.5 XBot.7 XBot.9 XBot.11 XBot.13 XBot.15 YBot.1 YBot.3 YBot.5 YBot.7 YBot.9 YBot.11 YBot.13 YBot.15 | length 7
  Top Layer w0.152: v2(-12.155,12.686) C1.1@-12.155,13.995 ; C5.1@-12.054,-14.326 v2(-12.054,-13.118) ; v2(12.155,12.737) C3.1@12.155,14.021 ; C7.1@12.206,-14.376 v2(12.206,-13.27)
  Bottom Layer w0.254: R46n.1@9.984,-6.753 R46n.1@9.984,-6.736 R54n.1@10.991,-6.736 ; R14n.1@9.984,6.267 R14n.1@9.984,6.284 R22n.1@10.991,6.284
NetC2_1: C2.1 P1.1 R1.2 | length 3.9
  Top Layer w0.152: R1.2@-8.415,13.995 -8.411,14 P1.1@-6.5,14
  Bottom Layer w0.152: C2.1@-6.669,12.09 -6.5,12.259 P1.1@-6.5,14
NetC4_1: C4.1 P2.1 R2.2 | length 3.9
  Top Layer w0.152: P2.1@6.5,14 R2.2@8.411,14
  Bottom Layer w0.152: P2.1@6.5,14 6.5,12.31 C4.1@6.694,12.116
NetC6_1: C6.1 P3.1 R3.2 | length 3.8
  Top Layer w0.152: R3.2@-8.264,-14.35 P3.1@-6.5,-14.35
  Bottom Layer w0.152: C6.1@-6.644,-12.37 -6.5,-12.513 P3.1@-6.5,-14.35
NetC8_1: C8.1 P4.1 R4.2 | length 4
  Top Layer w0.152: P4.1@6.5,-14.35 8.389,-14.35 R4.2@8.415,-14.376
  Bottom Layer w0.152: P4.1@6.5,-14.35 6.5,-12.539 C8.1@6.669,-12.37
NetR1n_2: R1n.2 R1x.2 R1y.1 SiPM1.25 | length 5.3
  Top Layer w0.152: SiPM1.25@-4.185,8.71 -3.279,8.71 v1(-2.997,8.992) R1x.2@-2.287,8.992
  Bottom Layer w0.152: R1n.2@-5.436,9.279 -3.285,9.279 v1(-2.997,8.992) R1y.1@-2.287,8.992
NetR1x_1: R1x.1 R2x.1 R3x.1 R4x.1 R5x.1 R6x.1 R7x.1 R8x.1 XBot.16 | length 37.6
  Top Layer w0.152: v1@-11.837,9.474 v1(-11.887,9.474) ; R4x.1@-11.406,9.017 -11.43,9.017 v1(-11.887,9.474) ; R3x.1@-11.406,9.906 -11.455,9.906 v1(-11.887,9.474) ; R1x.1@-1.777,8.992 -1.345,9.423 R2x.1@-1.777,9.855 ; R8x.1@1.634,9.027 1.61,9.027 v1(1.153,9.484) 1.585,9.916 R7x.1@1.634,9.916 ; R5x.1@11.263,9.002 11.695,9.433 R6x.1@11.263,9.865
  X w0.152: v1(-11.887,9.474) -10.719,10.643 -2.464,10.643 v1(-1.245,9.423) -0.787,8.966 0.635,8.966 v1(1.153,9.484) 2.337,10.668 10.561,10.668 v1(11.795,9.433)
  Bottom Layer w0.152: v1(11.795,9.433) 11.867,9.362 12.482,9.362 14.159,7.685 XBot.16@14.159,4.445
NetR1y_2: R1y.2 R9y.1 R17y.1 R25y.1 R33y.1 R41y.1 R49y.1 R57y.1 YBot.8 | length 38.7
  Y w0.152: v1(-8.179,0.914) -3.94,0.914 -2.443,2.412 -2.443,2.739 -1.829,3.353 ; v1(-1.219,-9.058) -1.585,-9.058 -1.93,-8.712 -1.93,-5.197 v1(-1.219,-4.486) -1.585,-4.486 -1.829,-4.242 -1.829,3.353 ; v1(-1.219,8.534) -1.93,7.823 -1.93,4.343 -1.549,3.962 v1(-1.219,3.962) -1.829,3.353
  Bottom Layer w0.152: YBot.8@-14.159,0.635 -8.458,0.635 v1(-8.179,0.914) ; R57y.1@-1.777,-9.515 -1.32,-9.058 R49y.1@-1.777,-8.6 ; R41y.1@-1.777,-4.943 -1.32,-4.486 R33y.1@-1.777,-4.028 ; R25y.1@-1.777,3.505 -1.32,3.962 R17y.1@-1.777,4.42 ; R9y.1@-1.777,8.077 -1.32,8.534 R1y.2@-1.777,8.992
NetR2n_2: R2n.2 R2x.2 R2y.2 SiPM1.24 | length 4.1
  Top Layer w0.152: SiPM1.24@-4.185,9.11 -3.685,9.11 -2.889,9.906 R2x.2@-2.287,9.906
  Bottom Layer w0.152: R2n.2@-2.997,11.041 v1(-2.997,9.906) R2y.2@-2.304,9.906
NetR2y_1: R2y.1 R10y.1 R18y.1 R26y.1 R34y.1 R42y.1 R50y.1 R58y.1 YBot.6 | length 44.4
  Y w0.152: v1@-0.711,-3.114 -0.663,-3.162 v1@-0.663,-10.381 ; v1@-0.686,-3.089 v1(-0.686,2.616) ; v1@-0.663,2.639 -0.663,9.858 -0.711,9.906 -0.584,10.033 v1(-0.533,10.033)
  X w0.152: v1@-8.966,1.524 -2.261,1.524 -1.168,2.616 v1(-0.686,2.616)
  Bottom Layer w0.152: YBot.6@-14.159,1.905 -13.335,1.905 -12.395,0.965 -9.55,0.965 v1(-8.992,1.524) ; R58y.1@-1.777,-10.404 v1(-0.686,-10.404) ; R50y.1@-1.777,-7.711 -1.68,-7.614 -0.783,-7.614 v1@-0.711,-7.686 ; R42y.1@-1.777,-5.806 -1.629,-5.954 -0.808,-5.954 -0.686,-5.832 -0.676,-5.842 v1@-0.635,-5.842 ; R34y.1@-1.777,-3.139 -1.68,-3.042 -0.783,-3.042 v1@-0.711,-3.114 ; R26y.1@-1.777,2.616 v1(-0.686,2.616) ; R18y.1@-1.777,5.309 -1.68,5.406 -0.783,5.406 v1@-0.711,5.334 ; R10y.1@-1.777,7.214 -1.629,7.066 -0.808,7.066 v1(-0.686,7.188) ; R2y.1@-1.777,9.881 -1.68,9.978 -0.783,9.978 -0.711,9.906 -0.584,10.033 v1(-0.533,10.033)
  other v1: -0.635,-7.595 -0.584,-5.969 -0.61,-3.023 -0.635,5.41
NetR3n_2: R3n.2 R3x.2 R3y.2 SiPM1.17 | length 4.6
  Top Layer w0.152: R3x.2@-10.955,9.906 v1(-10.109,9.906) -10.109,9.864 -9.355,9.11 SiPM1.17@-8.855,9.11
  Bottom Layer w0.152: R3y.2@-10.955,9.906 R3y.2@-10.896,9.906 v1(-10.109,9.906) -10.109,10.693 -9.873,10.93 R3n.2@-9.873,11.1
NetR3y_1: R3y.1 R11y.1 R19y.1 R27y.1 R35y.1 R43y.1 R51y.1 R59y.1 YBot.4 | length 38.7
  Y w0.152: v1@-12.518,-10.383 -12.518,-3.135 -12.497,-3.114 -12.487,-3.124 v1(-12.471,-3.124) ; v1@-12.518,2.637 -12.518,9.885 v1(-12.497,9.906) ; v1@-12.471,-3.089 v1(-12.471,2.591)
  Bottom Layer w0.152: YBot.4@-14.159,3.175 -15.418,3.175 -16.078,3.835 -16.078,6.325 v1(-12.497,9.906) -12.374,10.029 R3y.1@-11.528,10.029 ; v1(-12.497,-7.711) -12.374,-7.589 R51y.1@-11.528,-7.589 ; v1(-12.497,5.309) -12.374,5.431 R19y.1@-11.528,5.431 ; v1(-12.471,-10.429) -12.4,-10.501 -11.503,-10.501 R59y.1@-11.406,-10.404 ; v1(-12.471,-5.832) -12.4,-5.904 -11.503,-5.904 R43y.1@-11.406,-5.806 ; v1(-12.471,-3.124) -12.487,-3.124 -12.497,-3.114 -12.374,-2.991 R35y.1@-11.528,-2.991 ; v1(-12.471,2.591) -12.4,2.519 -11.503,2.519 R27y.1@-11.406,2.616 ; v1(-12.471,7.188) -12.4,7.116 -11.503,7.116 R11y.1@-11.406,7.214
NetR4n_2: R4n.2 R4x.2 R4y.2 SiPM1.16 | length 5.4
  Top Layer w0.152: R4x.2@-10.896,9.017 -10.109,9.017 -9.802,8.71 SiPM1.16@-8.855,8.71
  Bottom Layer w0.152: R4y.2@-10.896,9.017 -10.033,9.017 -9.771,9.279 R4n.2@-7.747,9.279
  other v1: -10.109,8.992
NetR4y_1: R4y.1 R12y.1 R20y.1 R28y.1 R36y.1 R44y.1 R52y.1 R60y.1 YBot.2 | length 29.5
  Y w0.152: v1(-11.963,-9.058) -11.303,-8.397 -11.303,-5.121 v1(-11.963,-4.46) -11.252,-3.749 -11.252,3.302 -11.913,3.962 v1(-11.963,3.962) -11.303,4.623 -11.303,7.899 v1(-11.963,8.56)
  Bottom Layer w0.152: YBot.2@-14.159,4.445 -14.148,4.456 -14.148,6.375 v1(-11.963,8.56) ; R60y.1@-11.406,-9.515 -11.863,-9.058 R52y.1@-11.406,-8.6 ; R44y.1@-11.406,-4.917 -11.863,-4.46 R36y.1@-11.406,-4.003 ; R28y.1@-11.406,3.505 -11.863,3.962 R20y.1@-11.406,4.42 ; R12y.1@-11.406,8.103 -11.863,8.56 R4y.1@-11.406,9.017
NetR5n_2: R5n.2 R5x.2 R5y.2 SiPM2.25 | length 5.4
  Top Layer w0.152: SiPM2.25@8.855,8.72 9.761,8.72 v1@10.043,9.002 ; v1(10.084,8.966) 10.078,8.966 v1@10.043,9.002 ; R5x.2@10.753,9.002 v1@10.043,9.002
  Bottom Layer w0.152: R5n.2@7.604,9.289 9.755,9.289 10.078,8.966 v1(10.084,8.966) 10.718,8.966 R5y.2@10.753,9.002
NetR5y_1: R5y.1 R13y.1 R21y.1 R29y.1 R37y.1 R45y.1 R53y.1 R61y.1 YBot.16 | length 52.2
  Y w0.152: v1(11.821,-9.068) 11.125,-8.372 11.125,-5.191 v1(11.821,-4.496) 11.176,-3.851 11.176,3.505 11.643,3.972 v1(11.821,3.972) 11.125,4.668 11.125,7.849 v1(11.821,8.544)
  X w0.152: v1(-7.366,-1.524) -7.112,-1.524 -6.782,-1.194 v1(11.201,-1.194)
  Bottom Layer w0.152: YBot.16@-14.159,-4.445 -13.691,-4.445 -13.041,-3.795 -13.041,-2.91 -11.35,-1.219 -7.544,-1.219 -7.366,-1.397 v1(-7.366,-1.524) ; R61y.1@11.263,-9.525 11.72,-9.068 R53y.1@11.263,-8.61 ; R45y.1@11.263,-4.907 11.409,-4.907 v1(11.821,-4.496) ; R37y.1@11.263,-4.038 v1@11.72,-4.496 ; R29y.1@11.263,3.515 11.72,3.972 R21y.1@11.263,4.43 ; R13y.1@11.263,8.087 11.72,8.544 R5y.1@11.263,9.002
NetR6n_2: R6n.2 R6x.2 R6y.2 SiPM2.24 | length 4.6
  Top Layer w0.152: SiPM2.24@8.855,9.12 9.43,9.12 10.043,9.733 v1(10.043,9.916) ; v1@10.151,9.916 R6x.2@10.753,9.916
  Bottom Layer w0.152: R6n.2@8.984,11.11 10.043,10.051 v1(10.043,9.916) R6y.2@10.736,9.916
NetR6y_1: R6y.1 R14y.1 R22y.1 R30y.1 R38y.1 R46y.1 R54y.1 R62y.1 YBot.14 | length 58.4
  Y w0.152: v1(12.182,-2.977) v1@12.329,-3.124 ; v1(12.182,2.546) 12.274,2.546 v1@12.354,2.626 ; v1(12.329,9.916) 12.377,9.868 12.377,2.649 v1@12.354,2.626 ; v1(12.354,-10.414) 12.377,-10.391 12.377,-9.63 12.375,-9.628 12.375,-3.17 v1@12.329,-3.124 ; v1@12.329,-3.124 12.354,-3.099 v1@12.354,2.626
  X w0.152: v1(-10.439,-0.533) -9.754,-0.533 -9.449,-0.838 2.261,-0.838 2.87,-0.229 v1(12.395,-0.229)
  Bottom Layer w0.152: YBot.14@-14.159,-3.175 -13.665,-3.175 -13.356,-2.866 -13.356,-2.758 -13.005,-2.407 -13.005,-1.93 -11.608,-0.533 v1(-10.439,-0.533) ; R62y.1@11.263,-10.414 v1(12.354,-10.414) ; R54y.1@11.263,-7.721 11.36,-7.624 12.257,-7.624 v1(12.329,-7.696) ; R46y.1@11.263,-5.816 11.411,-5.964 12.232,-5.964 v1(12.354,-5.842) ; R30y.1@11.263,2.626 12.354,2.626 12.274,2.546 v1(12.182,2.546) ; R22y.1@11.263,5.319 11.36,5.416 12.257,5.416 v1(12.329,5.344) ; R14y.1@11.263,7.224 11.411,7.076 12.232,7.076 v1(12.354,7.198) ; R6y.1@11.263,9.891 11.36,9.988 12.257,9.988 v1(12.329,9.916) ; R38y.1@11.36,-3.052 12.257,-3.052 v1(12.182,-2.977)
NetR7n_2: R7n.2 R7x.2 R7y.2 SiPM2.17 | length 4.6
  Top Layer w0.152: R7x.2@2.085,9.916 v1(2.931,9.916) 2.931,9.799 3.61,9.12 SiPM2.17@4.185,9.12
  Bottom Layer w0.152: R7y.2@2.085,9.916 R7y.2@2.144,9.916 v1(2.931,9.916) 2.931,10.5 3.15,10.719 R7n.2@3.15,11.074